# Altium PCB PCB1.PcbDoc
Units mm, origin at the board's own origin, x right, y up, seen from the top; angles counter-clockwise.
Board outline 167 x 167 mm, 2 copper layers (Top Layer, Bottom Layer); 6 components, 5 nets, 18 pads, 0 vias.
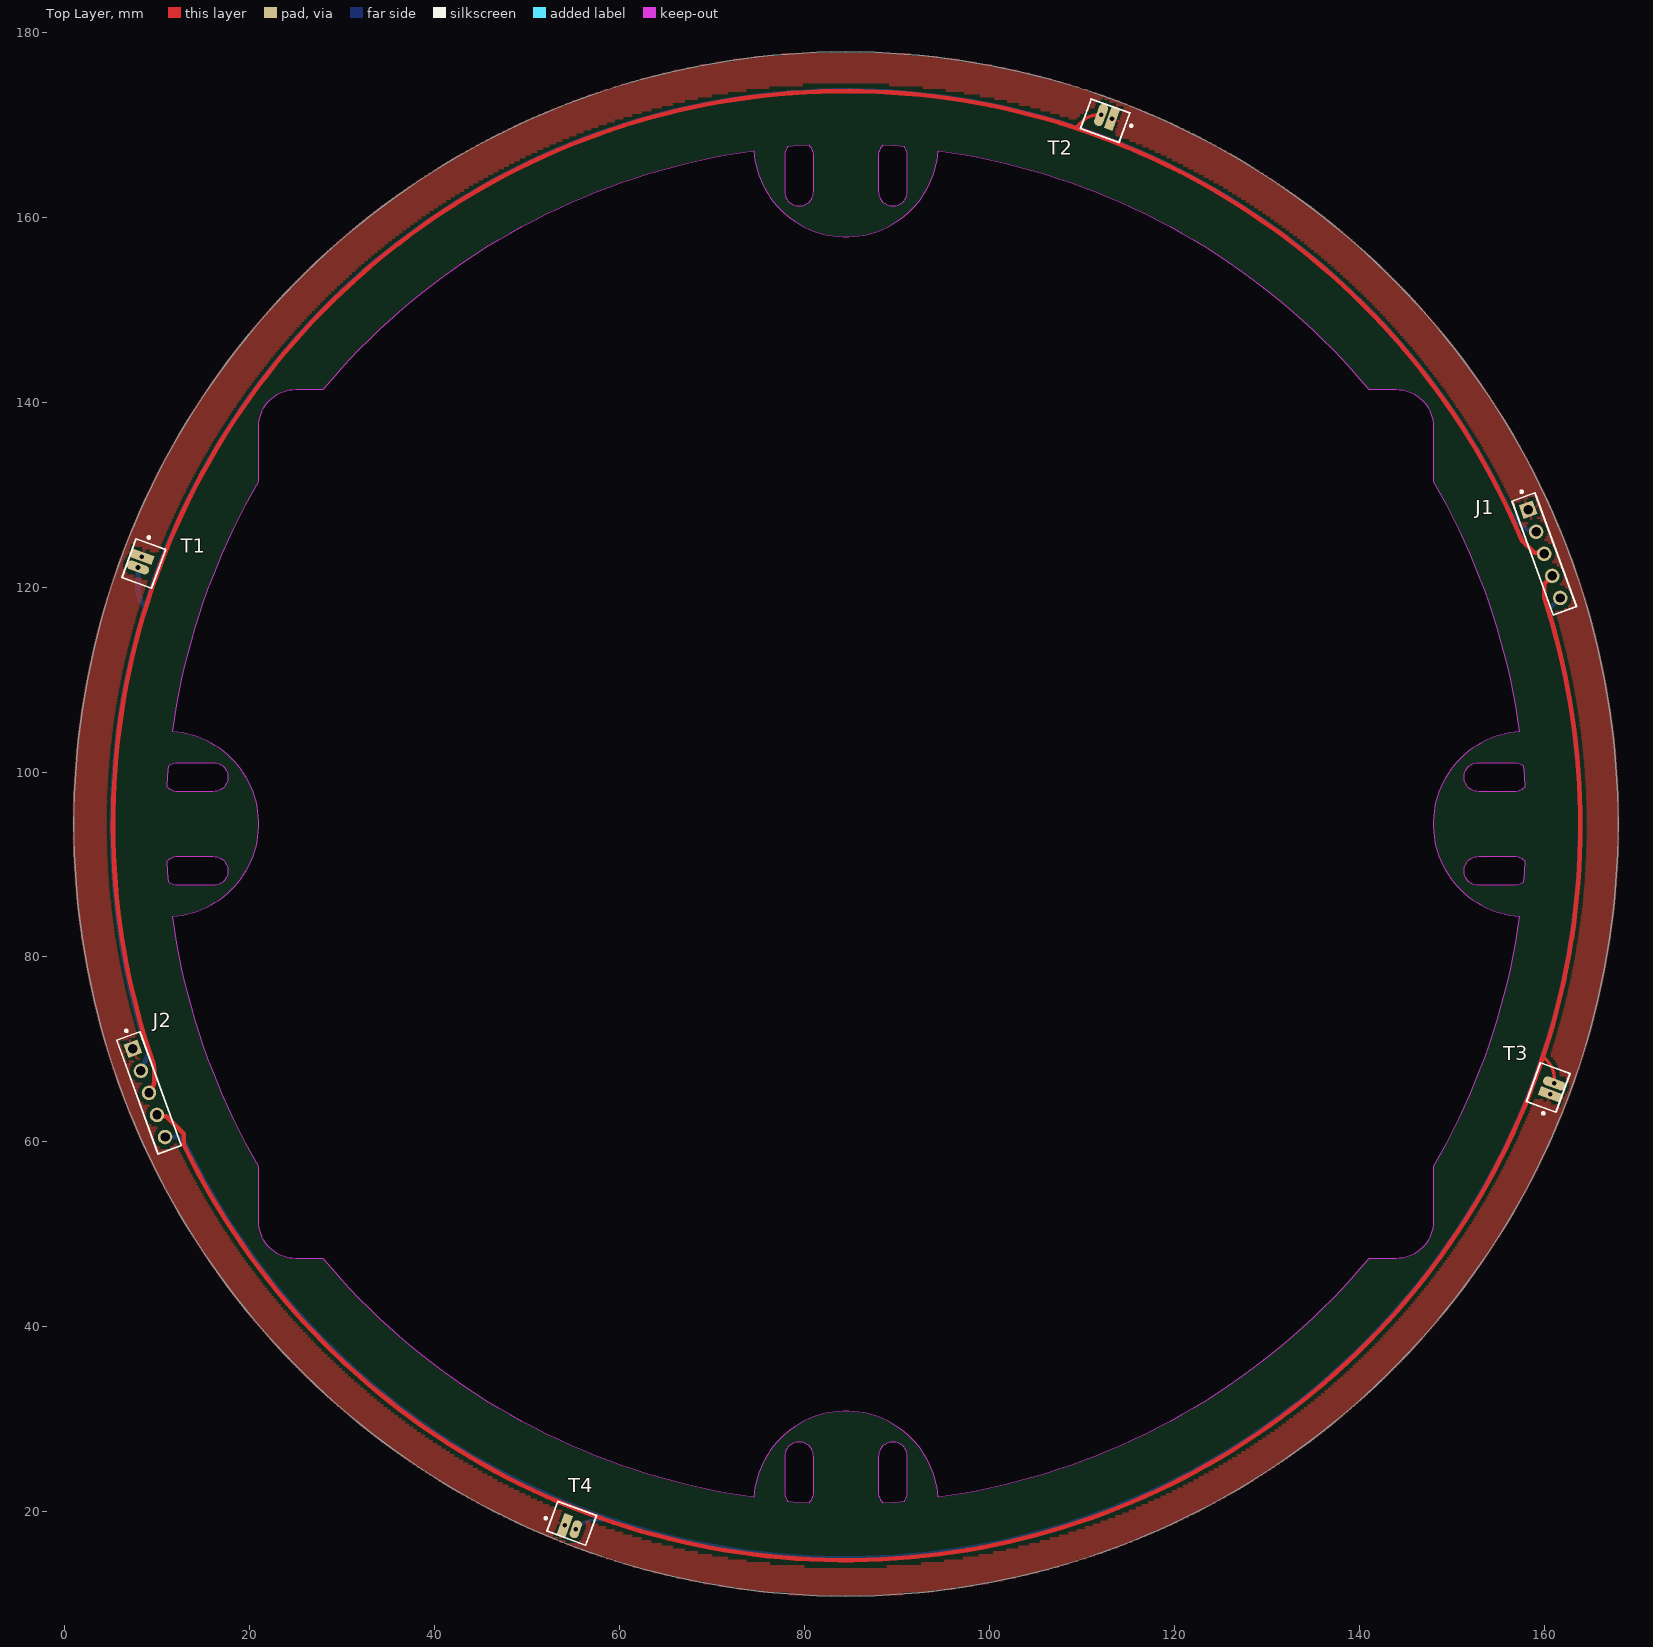
[diagram p0: Top Layer view]
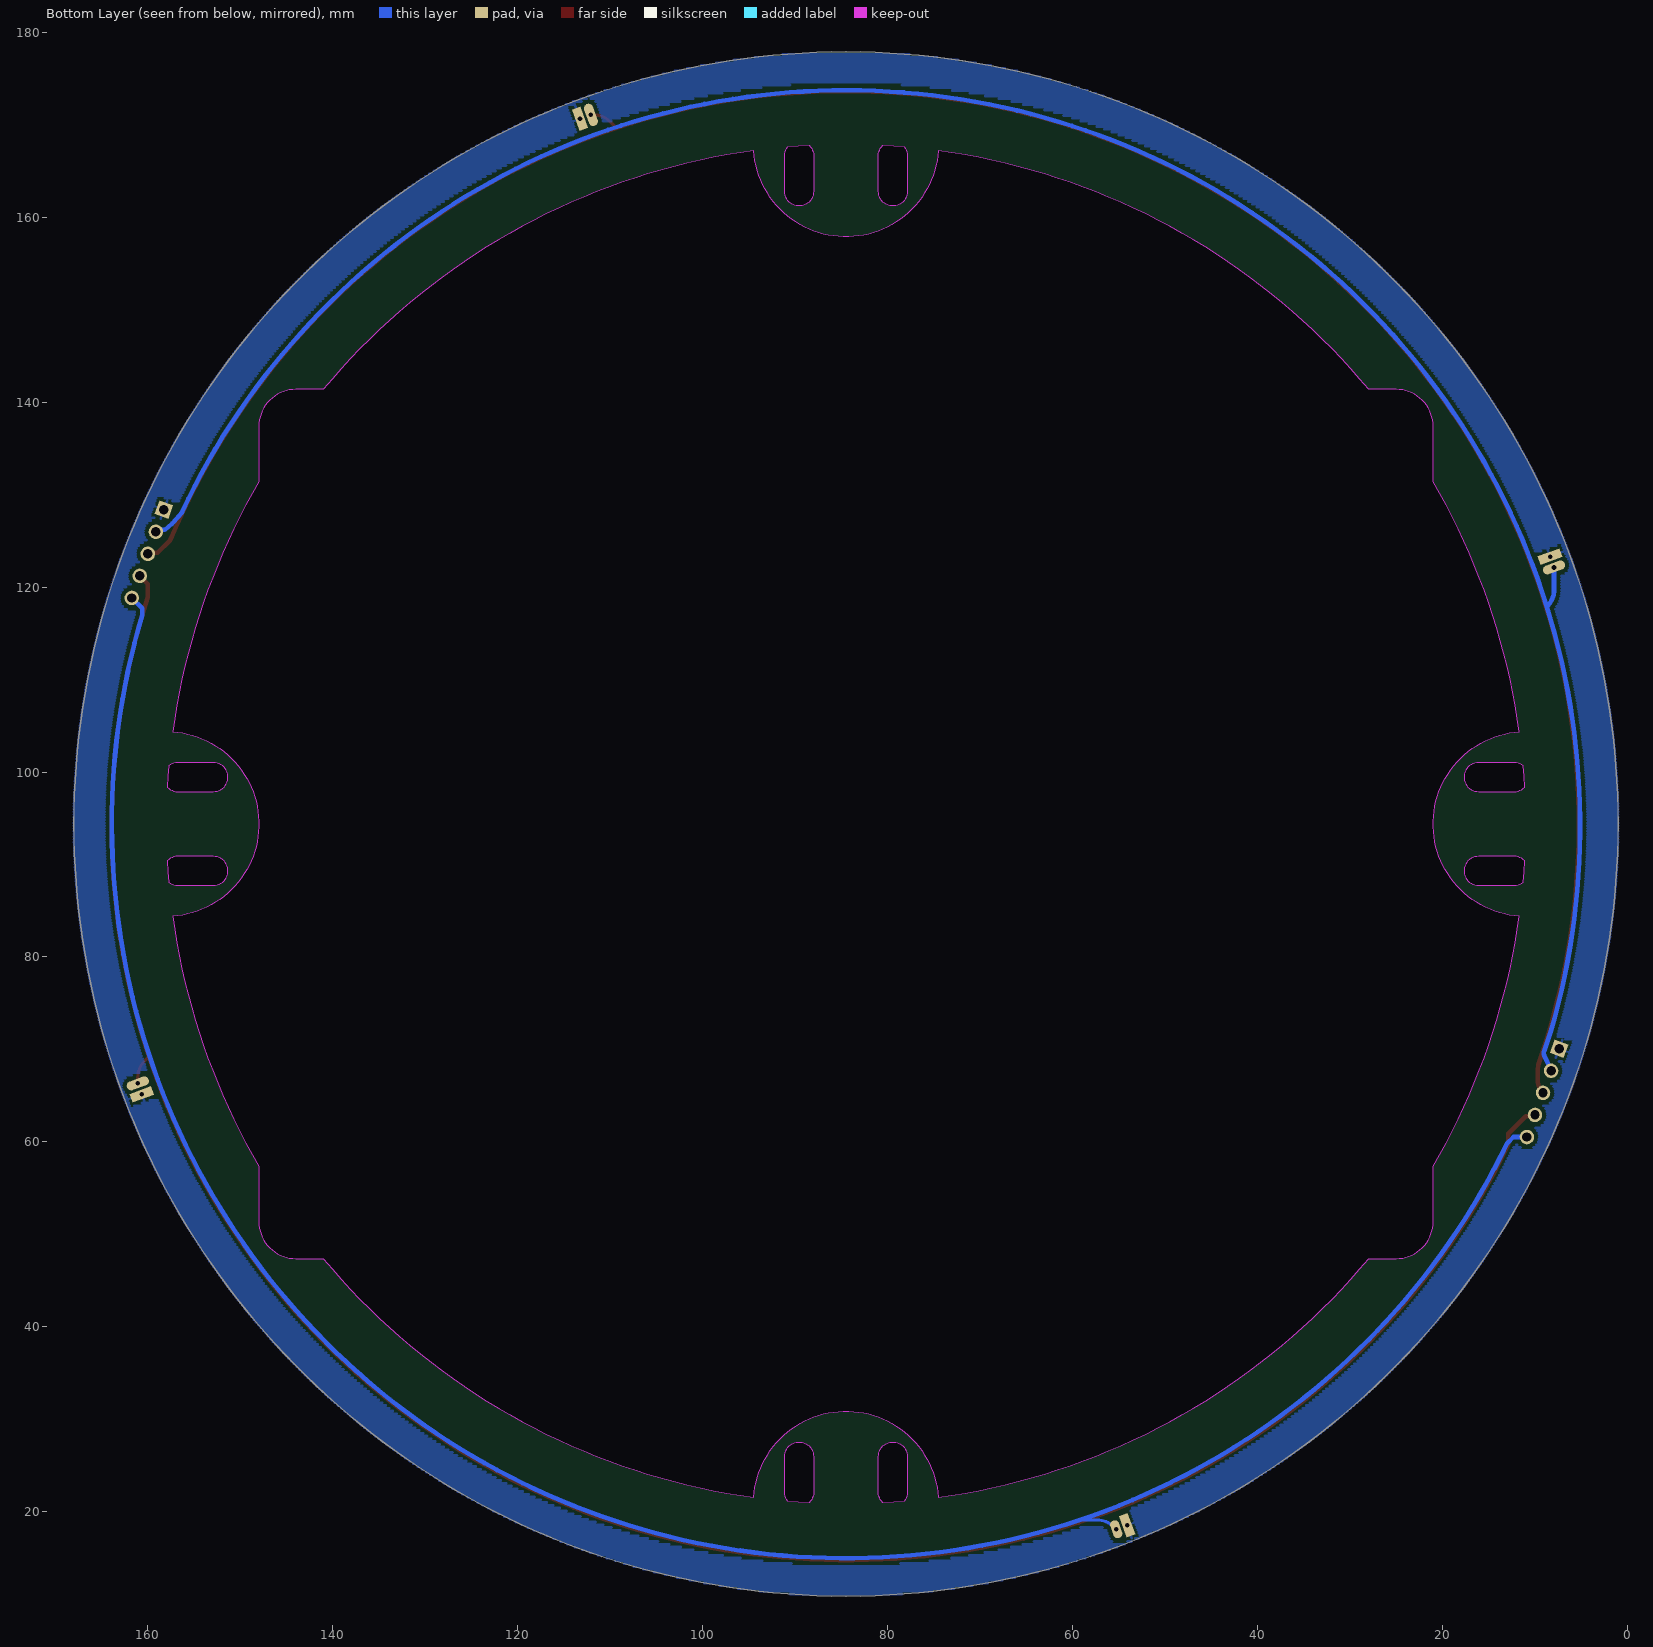
[diagram p1: Bottom Layer view, seen from below]
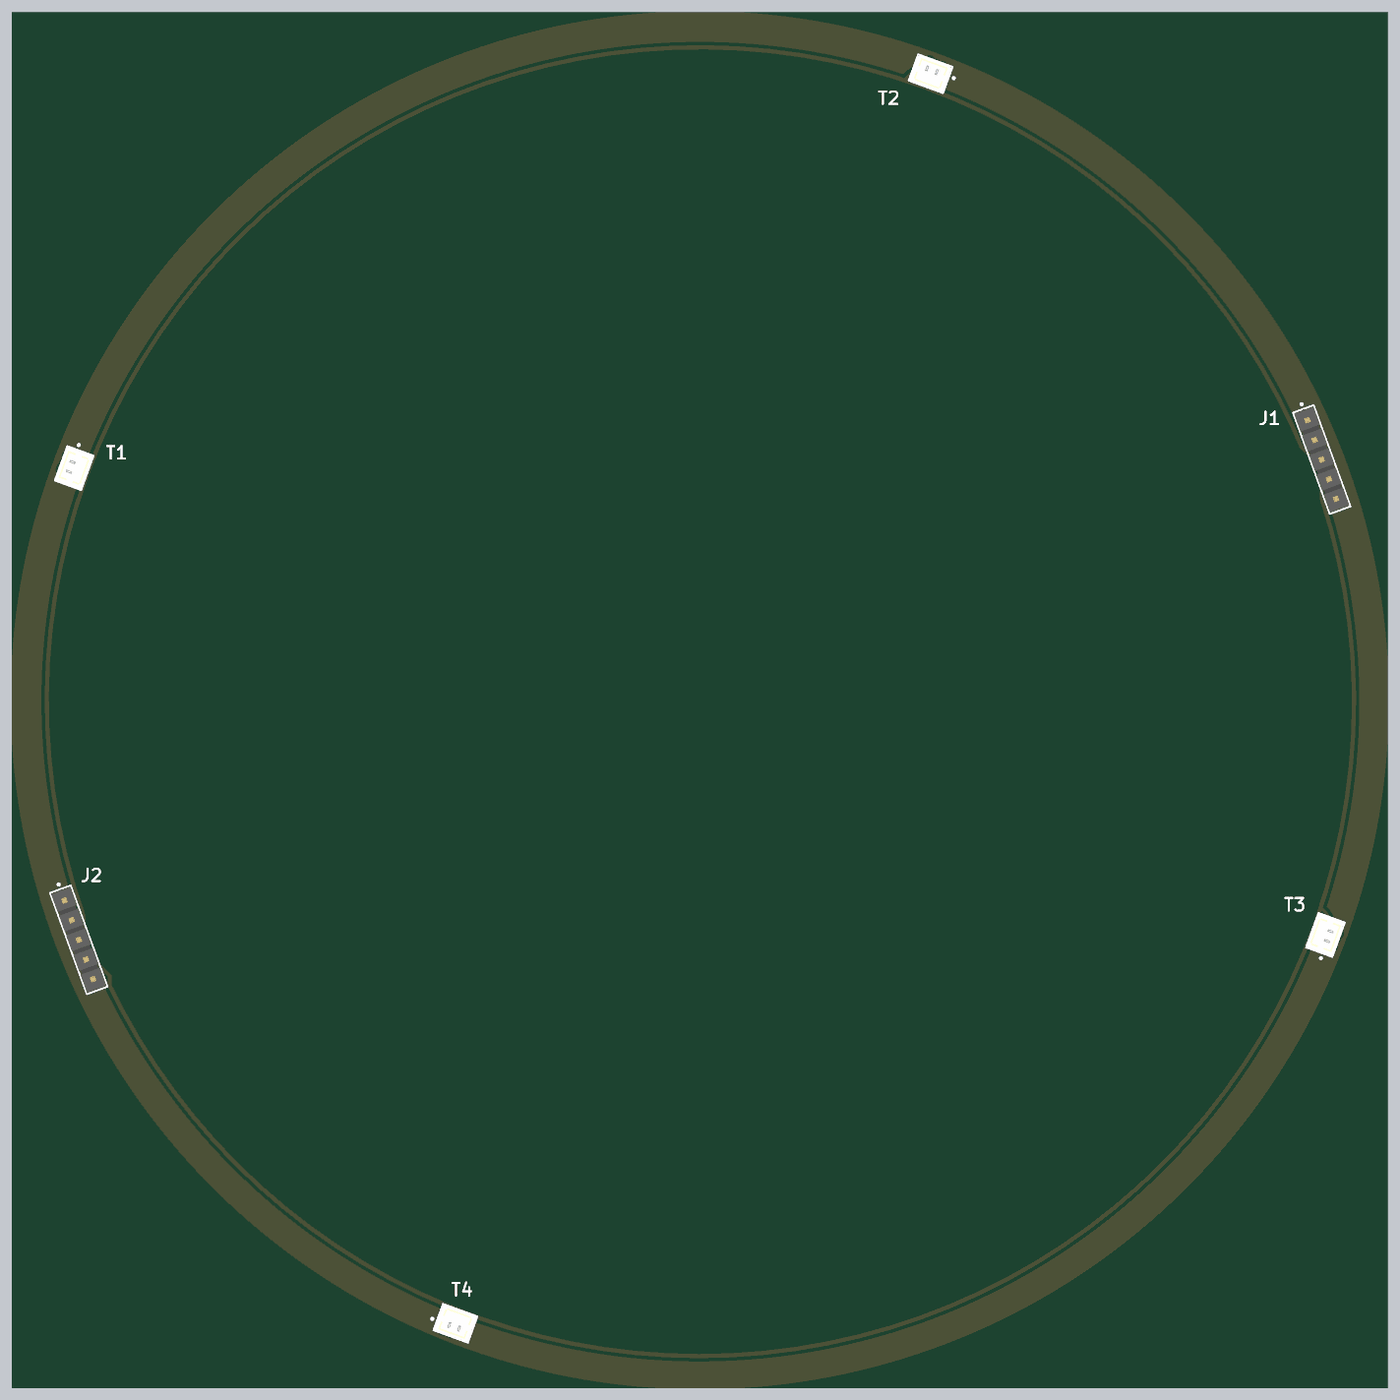
[diagram p2: 3D render of the assembled board from above, using the file's embedded part models]

## Layer stack, top to bottom
Top Solder: solder mask 0.0102, Solder Resist, Dk 3.5
Top Layer: signal copper 0.0356
Dielectric 1: dielectric 0.32, FR-4, Dk 4.8
Bottom Layer: signal copper 0.0356
Bottom Solder: solder mask 0.0102, Solder Resist, Dk 3.5

## Board outline
84.5,10.881 cw(c84.5,94.381) 1,94.381 cw(c84.5,94.381) 84.5,177.881 cw(c84.5,94.381) 168,94.381 cw(c84.5,94.381)
cut-out: 152.908,97.881 cw(c152.908,99.448) 152.908,101.016 156.756,101.016 cw(c156.756,99.448) 157.73,100.676 cw(c84.511,94.381) 157.892,98.368 cw(c156.756,99.448) 156.756,97.881
cut-out: 152.908,87.746 cw(c152.908,89.313) 152.908,90.881 156.756,90.881 cw(c156.756,89.313) 157.892,90.394 cw(c84.515,94.38) 157.73,88.085 cw(c156.756,89.313) 156.756,87.746
cut-out: 88,22.125 ccw(c89.567,22.125) 88.487,20.989 ccw(c84.5,94.375) 90.796,21.151 ccw(c89.567,22.125) 91.135,22.125 91.135,25.972 ccw(c89.567,25.972) 88,25.972
cut-out: 77.865,22.125 ccw(c79.433,22.125) 78.204,21.151 ccw(c84.5,94.382) 80.513,20.989 ccw(c79.433,22.125) 81,22.125 81,25.972 ccw(c79.433,25.972) 77.865,25.972
cut-out: 88,162.789 ccw(c89.567,162.789) 91.135,162.789 91.135,166.637 ccw(c89.567,166.637) 90.796,167.611 ccw(c84.501,94.391) 88.487,167.772 ccw(c89.567,166.637) 88,166.637
cut-out: 77.865,162.789 ccw(c79.433,162.789) 81,162.789 81,166.637 ccw(c79.433,166.637) 80.513,167.772 ccw(c84.499,94.396) 78.204,167.611 ccw(c79.433,166.637) 77.865,166.637
cut-out: 12.244,97.881 cw(c12.244,99.448) 11.108,98.368 cw(c84.494,94.381) 11.27,100.676 cw(c12.244,99.448) 12.244,101.016 16.092,101.016 cw(c16.092,99.448) 16.092,97.881
cut-out: 11.27,88.085 cw(c84.507,94.381) 11.108,90.394 cw(c12.244,89.313) 12.244,90.881 16.092,90.881 cw(c16.092,89.313) 16.092,87.746 12.244,87.746 cw(c12.244,89.313)
cut-out: 21,57.367 cw(c84.5,94.381) 11.68,84.404 ccw(c11,94.381) 11.68,104.358 cw(c84.5,94.381) 21,131.394 21,137.381 cw(c25,137.381) 25,141.381 27.991,141.381 cw(c84.5,94.381) 74.523,167.2 ccw(c84.5,167.881) 94.477,167.2 cw(c84.5,94.381) 141.009,141.381 144,141.381 cw(c144,137.381) 148,137.381 148,131.394 cw(c84.5,94.381) 157.32,104.358 ccw(c158,94.381) 157.32,84.404 cw(c84.5,94.381) 148,57.367 148,51.381 cw(c144,51.381) 144,47.381 141.009,47.381 cw(c84.5,94.381) 94.477,21.561 ccw(c84.5,20.881) 74.523,21.561 cw(c84.5,94.381) 27.991,47.381 25,47.381 cw(c25,51.381) 21,51.381

## Design rules (kind name [scope] priority, off if disabled: settings)
Clearance [All] p1: gap=0.4 ignorepadtopadclearanceinfootprint=FALSE
PolygonConnect [All] p1: connectstyle=Relief reliefconductorwidth=0.254 reliefentries=4 polygonreliefangle="90 Angle" airgapwidth=0.254
RoutingCorners [All] p1: cornerstyle=Round minsetback=2.54 maxsetback=2.54
RoutingVias [All] p1: holewidth=0.711 width=1.27 viastyle="Through Hole" minholewidth=0.711 minwidth=1.27 maxholewidth=0.711 maxwidth=1.27
SolderMaskExpansion [All] p1: expansion=0.102 istentingtop=FALSE
SupplyNets "Schematic Supply Nets" [InNet('+3V3')] p1: voltage=0.000
Width [All] p1 off: maxlimit=0.5 minlimit=0.24 preferedwidth=0.35
29 further rules are at their usual default settings.

## Classes and differential pairs
component class tempDonut: J1 T1 T2 T3 T4

## Components (designator, comment, footprint, x,y, rotation, side; value= is the part's Value field where it differs from the comment)
J1 "TSW-105-22-G-S" FP-TSW-105-22-G-S-MFG 160,123.597 r290 top
J2 "TSW-105-22-G-S" FP-TSW-105-22-G-S-MFG 9.124,65.304 r290 top
T1 "53047-0210" FP-53047-0210-MFG#1 8.566,122.558 r70 top
T2 "53047-0210" FP-53047-0210-MFG#1 112.522,170.434 r340 top
T3 "53047-0210" FP-53047-0210-MFG#1 160.446,65.892 r250 top
T4 "53047-0210" FP-53047-0210-MFG#2 54.843,18.751 r160 top

## Footprints (in the part's own frame and the unit in brackets; to place one, negate y for a bottom-side part, rotate by r counter-clockwise, add the part's x,y. Pads: shape width x height; smd on the part's side, far side on the other; paste and mask are expansions set on the pad)
FP-53047-0210-MFG#1 [mm]
  rect 1x2.5 / inner rect 1x1 / far side rect 1x2.5 hole 0.5 paste-2539.97 mask+0: 1(0.625,0.45)
  oval 1x2.5 / inner round 1 / far side oval 1x2.5 hole 0.5 paste-2539.97 mask+0: 2(-0.625,0.45)
  silkscreen extent -2.23,-1.7 2.95,1.7, body extent -2.32,-1.8 2.32,1.8, height 0.25
FP-53047-0210-MFG#2 [mm]
  rect 1x2.5 / inner rect 1x1 / far side rect 1x2.5 hole 0.5 paste-2539.97 mask+0: 1(0.625,0.45)
  oval 1x2 / inner round 1 / far side oval 1x2 hole 0.5 paste-2539.97 mask+0: 2(-0.625,0.45)
  silkscreen extent -2.23,-1.7 2.95,1.7, body extent -2.32,-1.8 2.32,1.8, height 0.25
FP-TSW-105-22-G-S-MFG [mm]
  rect 1.57x1.57 hole 1.02 paste-2539.97 mask+0: 1(-5.08,0)
  round 1.57 hole 1.02 paste-2539.97 mask+0: 2(-2.54,0) 3(0,0) 4(2.54,0) 5(5.08,0)
  silkscreen extent -7.26,-1.33 6.54,1.33, body extent -6.64,-1.44 6.64,1.44, height 0.25

## Part data
J1 J2: library part CMP-02766-000105-1, "CONN HEADER VERT 5POS 2.54MM", Contact Material=Bronze, Contact Plating=Gold, Gender=Male, Mount="Through Hole", Number of Contacts=5, Number of Rows=1, REACH SVHC="No SVHC", Termination="Through Hole"
T1 T2 T3 T4: library part CMP-2000-05628-3, "CONN HEADER VERT 2POS 1.25MM", Ambient Temperature Range High=+85°C, Ambient Temperature Range Low=-40°C, Current Rating=1A, Manufacturer=Molex, Package=0, Temperature="-40°C to +85°C", Voltage Rating=125V, Automotive=No, Category=Conn, ComponentLink2Description=Datasheet, ComponentLink2URL=http://www.molex.com/webdocs/datasheets/pdf/en-us/0530470210_PCB_HEADERS.pdf, Conn Gender=Male, Conn Orientation=Vertical, Contact Material=Tin, Device Class L1=Connectors, Device Class L2="Headers and Wire Housings", Device Class L3=unset, Digikey Description="CONN HEADER VERT 2POS 1.25MM", Footprint Url=https://www.molex.com/pdm_docs/sd/530470210_sd.pdf, Height=4.4mm, Lead Free=Yes, Manufacturer Part Number=53047-0210, Mouser Description="1.25mm Pitch PicoBlade™ Wire-to-Board Header, Vertical, with Friction Lock, 2 Circuits", Number of Contacts=2, Number of Rows=1, Octopart=https://octopart.com/53047-0210-molex-276772, Pitch=1.25mm, RoHS=TRUE, Temperature Range High=+85°C, Temperature Range Low=-40°C

## Nets (pads, with @x,y where several pads share a name; then routed paths per layer and width w, separated by ;. In a path a pad name is that pad's centre, name@x,y a point inside that pad or via, vN(x,y) a via of type N, cw(c..) or ccw(c..) an arc to the next point about the centre after c; other vN are vias at no path point)
+3V3: J1.1 J2.1 T1.1 T2.1 T3.1 T4.1
temp1: J1.2 J2.2 T1.2 | length 249.9
  Bottom Layer w0.5: T1.2 7.93,119.704 ccw(c10.47,119.704) 8.674,117.908 8.709,117.873 ; J2.2 ccw(c8.218,67.728) 8.27,67.728 cw(c8.77,67.728) 8.319,67.943 8.979,69.329 ccw(c8.392,69.609) 9.006,69.824 8.271,71.943 ; 8.27,71.944 cw(c85.04,94.178) 10.234,122.321 cw(c84.5,94.381) 156.289,128.18 156.289,128.091 157.305,126.936 ccw(c157.793,127.365) 157.38,126.863 158.162,126.217 158.898,126.217 J1.2
temp2: J1.3 J2.3 T2.2 | length 253.5
  Top Layer w0.35: 109.34,169.651 110.016,170.327 cw(c111.812,168.531) 111.812,171.071 T2.2 ; 113.423,168.178 113.463,168.219
  Top Layer w0.5: J2.3 ccw(c7.759,66.668) 9.689,66.668 9.689,67.633 ccw(c8.255,67.691) 9.685,67.812 9.643,68.322 ; 9.643,68.323 cw(c84.5,94.381) 157.576,125.082 158.954,123.704 159.893,123.704 J1.3
temp3: J1.4 J2.4 T3.2 | length 249.9
  Top Layer w0.35: 159.878,69.22 160.339,68.76 cw(c158.543,66.964) 161.083,66.964 T3.2
  Top Layer w0.5: J2.4 10.13,62.78 11.007,62.78 12.882,60.905 12.882,59.712 ccw(c84.455,94.234) 163.918,94.234 ccw(c84.455,94.234) 159.992,118.904 159.992,120.333 J1.4
temp4: J1.5 J2.5 T4.2 | length 245.6
  Bottom Layer w0.35: T4.2 55.538,18.376 cw(c57.334,16.58) 57.334,19.12 59.205,19.12
  Bottom Layer w0.5: J2.5 12.32,60.531 13.008,59.843 ccw(c84.5,94.381) 56.388,20.126 ; 56.388,20.134 56.388,20.126 ; J1.5 160.62,117.707 160.62,116.957 cw(c84.5,94.381) 56.388,20.126

## Polygon pours and split planes (outlines as drawn)
+3V3 on Bottom Layer "+3V3_L02_P002" (hatched Horizontal grid 0.3 track 0.3, remove dead copper, pour order 2): 84.5,10.881 cw(c84.5,94.381) 1,94.381 cw(c84.5,94.381) 84.5,177.881 cw(c84.5,94.381) 168,94.381 cw(c84.5,94.381)
+3V3 on Top Layer "Top Layer-+3V3" (hatched Horizontal grid 0.3 track 0.3, remove dead copper, pour order 1): 84.5,10.881 cw(c84.5,94.381) 1,94.381 cw(c84.5,94.381) 84.5,177.881 cw(c84.5,94.381) 168,94.381 cw(c84.5,94.381)

## Silkscreen, mask and mechanical layers (free items; w line width, h text height)
Mechanical 1:
  circle w1: c84.5,94.381 r83.5
  lines w1: 11.108,90.394 ccw(c84.5,94.381) 11.27,88.085 ccw(c12.244,89.313) 12.244,87.746 16.092,87.746 ccw(c16.092,89.313) 16.092,90.881 12.244,90.881 ccw(c12.244,89.313) 11.108,90.394 ; 11.108,98.368 cw(c84.5,94.381) 11.27,100.676 cw(c12.244,99.448) 12.244,101.016 16.092,101.016 cw(c16.092,99.448) 16.092,97.881 12.244,97.881 cw(c12.244,99.448) 11.108,98.368 ; 11.68,84.404 ccw(c84.5,94.381) 21,57.367 21,51.381 ccw(c25,51.381) 25,47.381 27.991,47.381 ccw(c84.5,94.381) 74.523,21.561 cw(c84.5,20.881) 94.477,21.561 ccw(c84.5,94.381) 141.009,47.381 144,47.381 ccw(c144,51.381) 148,51.381 148,57.367 ccw(c84.5,94.381) 157.32,84.404 cw(c158,94.381) 157.32,104.358 ccw(c84.5,94.381) 148,131.394 148,137.381 ccw(c144,137.381) 144,141.381 141.009,141.381 ccw(c84.5,94.381) 94.477,167.2 cw(c84.5,167.881) 74.523,167.2 ccw(c84.5,94.381) 27.991,141.381 25,141.381 ccw(c25,137.381) 21,137.381 21,131.394 ccw(c84.5,94.381) 11.68,104.358 cw(c11,94.381) 11.68,84.404 ; 77.865,22.125 ccw(c79.433,22.125) 78.204,21.151 ccw(c84.5,94.381) 80.513,20.989 ccw(c79.433,22.125) 81,22.125 81,25.972 ccw(c79.433,25.972) 77.865,25.972 77.865,22.125 ; 77.865,162.789 ccw(c79.433,162.789) 81,162.789 81,166.637 ccw(c79.433,166.637) 80.513,167.772 ccw(c84.5,94.381) 78.204,167.611 ccw(c79.433,166.637) 77.865,166.637 77.865,162.789 ; 88,22.125 ccw(c89.567,22.125) 88.487,20.989 ccw(c84.5,94.381) 90.796,21.151 ccw(c89.567,22.125) 91.135,22.125 91.135,25.972 ccw(c89.567,25.972) 88,25.972 88,22.125 ; 88,162.789 ccw(c89.567,162.789) 91.135,162.789 91.135,166.637 ccw(c89.567,166.637) 90.796,167.611 ccw(c84.5,94.381) 88.487,167.772 ccw(c89.567,166.637) 88,166.637 88,162.789 ; 152.908,87.746 cw(c152.908,89.313) 152.908,90.881 156.756,90.881 cw(c156.756,89.313) 157.892,90.394 cw(c84.5,94.381) 157.73,88.085 cw(c156.756,89.313) 156.756,87.746 152.908,87.746 ; 152.908,97.881 cw(c152.908,99.448) 152.908,101.016 156.756,101.016 cw(c156.756,99.448) 157.73,100.676 cw(c84.5,94.381) 157.892,98.368 cw(c156.756,99.448) 156.756,97.881 152.908,97.881
  lines w1.2: 1,94.381 cw(c84.5,94.381) 84.5,177.881 cw(c84.5,94.381) 168,94.381 cw(c84.5,94.381) 84.5,10.881 cw(c84.5,94.381) 1,94.381